# Allegro board DAVID_LUCA_2023_PACT_N8_rev6.brd
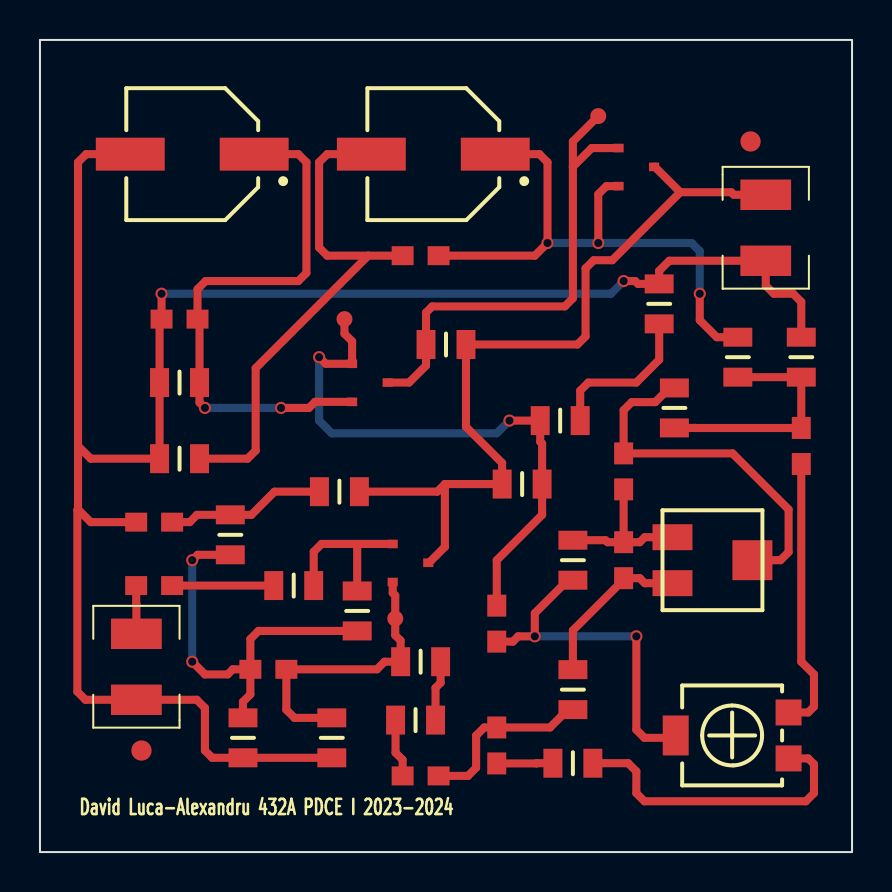
[diagram p0: board, top side]
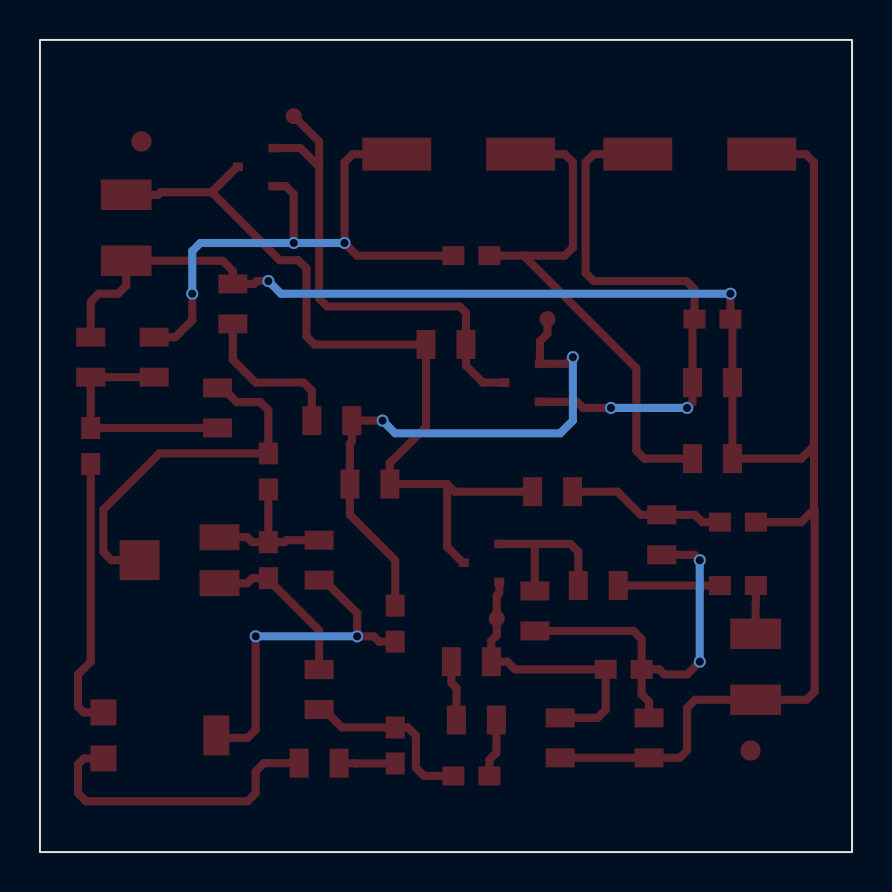
[diagram p1: board, bottom side, seen from below]

Outline 40.64 x 40.64 mm; copper layers: TOP, BOTTOM. Coordinates in mm from the lower left corner of the outline.
Outline path: rectangle 0,0 40.64,40.64

## Design rules (mm)
nets with their own width: min track width 0.406; nets 0 N56928 N56942 N57058 N57064 N57080 N57092 N57114 N57224 N57230 N57234 N57380 N57386 N57392 N57408 N57452 N57458 N57528 N57592 N57832 N57998 N58004 N576520 N576740 N578981

## Placement (name value [footprint] x y rotation side)
C1  100n  [CAPC2008X126N_0805]  5.71 13.34 0 top
C2  4.7u  [CAPC2008X126N_0805]  11.43 9.14 0 top
C3  4.7u  [CAPC2008X126N_0805]  19.05 3.81 0 top
C4  1u  [CAPC2008X126N_0805]  22.86 11.43 90 top
C5  10u  [CAPAE660X770N]  7.62 34.92 180 top
C6  10u  [CAPAE660X770N]  19.68 34.92 180 top
C7  4.7u  [CAPC2008X126N_0805]  5.71 16.51 0 top
C8  100n  [CAPC2008X126N_0805]  29.21 14.61 90 top
C9  100n  [CAPC2008X126N_0805]  29.21 19.05 90 top
C10  2.2n  [CAPC2008X126N_0805]  22.86 5.33 270 top
C11  2.2n  [CAPC2008X126N_0805]  38.1 20.32 90 top
C12  4.7u  [CAPC2008X126N_0805]  6.99 26.67 0 top
C13  4.7u  [CAPC2008X126N_0805]  19.05 29.84 180 top
IN  CON2  [1210RF_WV_12D]  4.83 9.27 270 top
J3  CON1  [TP80]  17.78 11.68 0 top
J4  CON1  [TP80]  15.24 26.67 0 top
J5  CON1  [TP80]  27.94 36.83 0 top
NOREF  Value  [unnamed]  35.56 35.56 0 top
NOREF#2  Value  [unnamed]  5.08 5.08 0 top
P1  50K  [TRIM_BI_23AN]  33.66 14.61 180 top
P2  100k  [TS53YL]  37.47 6.99 0 top
Q1  BC846B  [SOT23]  18.54 14.48 0 top
Q2  BC846B  [SOT23]  16.51 23.5 0 top
Q3  BC846B  [SOT23]  29.84 34.29 0 top
R1  1k  [RES2012X50N_0805]  12.7 13.34 0 top
R2  68k  [RES2012X50N_0805]  9.53 15.88 90 top
R3  100k  [RES2012X50N_0805]  10.16 5.71 90 top
R4  22k  [RES2012X50N_0805]  14.99 18.03 180 top
R5  100k  [RES2012X50N_0805]  15.88 12.06 270 top
R6  5.6K  [RES2012X50N_0805]  14.61 5.71 270 top
R7  330  [RES2012X50N_0805]  19.05 9.53 0 top
R8  1000k  [RES2012X50N_0805]  24.13 18.41 180 top
R9  100k  [RES2012X50N_0805]  26.04 21.59 180 top
R10  100k  [RES2012X50N_0805]  20.32 25.4 0 top
R11  22k  [RES2012X50N_0805]  6.99 23.5 0 top
R12  6.8k  [RES2012X50N_0805]  34.92 24.77 90 top
R13  2.7k  [RES2012X50N_0805]  38.1 24.77 270 top
R14  8.2k  [RES2012X50N_0805]  26.67 8.13 270 top
R15  8.2k  [RES2012X50N_0805]  31.75 22.23 90 top
R16  2.2k  [RES2012X50N_0805]  26.67 4.45 180 top
R17  15k  [RES2012X50N_0805]  26.67 14.61 90 top
R18  100k  [RES2012X50N_0805]  30.99 27.43 270 top
R19  33  [RES2012X50N_0805]  18.8 6.6 180 top
R20  2.5k  [RES2012X50N_0805]  6.99 19.68 0 top
VCC  CON2  [1210RF_WV_12D]  36.32 31.24 90 top

## Library data of the parts
C1-C4 C7-C13 = C
C5 C6 = CAP POL
IN VCC = CON2
J3-J5 = CON1
P1 P2 = POT
Q1-Q3 = BC846B
R1-R20 = R

## Footprints (pads in the part's own frame, mm; a bottom-side part is the same pattern mirrored in y, then rotated)
1210RF_WV_12D
  rect 1.524x2.54 smd: 1(-1.651,0) 2(1.651,0)
CAPAE660X770N
  rect 3.45x1.65 smd: 1(-3.1,0) 2(3.1,0)
CAPC2008X126N_0805
  rect 1.1x0.95 smd: 1(-0.9,0) 2(0.9,0)
RES2012X50N_0805
  rect 0.95x1.45 smd: 1(-1,0) 2(1,0)
SOT23
  rect 0.508x0.432 smd: 1(-0.889,0.94) 2(-0.889,-0.965) 3(0.889,0)
TP80
  round 0.8 smd: 1(0,0)
TRIM_BI_23AN
  rect 2x1.3 smd: 1(2,1.15) 2(2,-1.15)
  rect 2x2 smd: 3(-2,0)
TS53YL
  rect 1.3x1.3 smd: 1(0,0) 3(0,-2.3)
  rect 1.3x2 smd: 2(-5.65,-1.15)
unnamed
  round 1.016 smd: 1(0,0)

## Nets
0: C5.2 C7.1 C12.1 IN.2 R3.1 R6.2 R11.1 R13.1 R18.1 R20.1 VCC.1
N56928: C7.2 R2.2 R4.2
N56942: Q1.3 Q3.3 R4.1 R8.2 R10.2 VCC.2
N57058: C3.2 C10.1 R14.2
N57064: C8.1 P1.1 R14.1
N57080: C9.2 P1.3 R15.2
N57092: C11.2 R12.1 R13.2 R15.1
N57114: C8.2 C9.1 P1.2(T) R17.2
N57224: C4.2 J4.1 Q2.1 R8.1 R9.2
N57230: J5.1 Q2.3 Q3.1 R10.1
N57234: C2.1 R2.1 R3.2 R5.2
N57380: C1.1 IN.1
N57386: C1.2 R1.1
N57392: Q1.1 R1.2 R5.1
N57408: C6.1 C13.1 Q3.2(E) R12.2
N57452: C2.2 J3.1 Q1.2(E) R6.1 R7.1
N57458: C4.1 P2.2(T) R17.1
N57528: C6.2 C13.2 R20.2
N57592: C5.1 C12.2 Q2.2(E) R11.2
N57832: R9.1 R18.2
N57998: P2.3 R16.1
N58004: C11.1 P2.1
N576520: R7.2 R19.1
N576740: C3.1 R19.2
N578981: C10.2 R16.2

Pads without a net: NOREF 1; NOREF#2 1

## Via types
v1: diameter 0.61, hole 0.406, TOP to BOTTOM, 13 vias

## Routing (per net, layer and track width the routed paths; a pad name or vN(x,y) marks a point on that pad's centre or on a via; arc(x,y) is an arc through that point)
0: length 97
  TOP w0.406: 1.91,17.14 2.54,16.51 C7.1 ; 1.91,17.14 1.91,20.32 ; 1.91,17.14 1.87,17.11 1.87,8.03 2.28,7.62 IN.2 7.85,7.62 8.26,7.21 8.26,5.08 8.62,4.72 R3.1 R6.2 ; 1.91,20.32 2.54,19.68 R20.1 R11.1 5.99,26.4 6.09,26.5 C12.1 v1(6.09,27.94) ; 1.91,20.32 1.91,34.52 2.31,34.92 C5.2 ; v1(29.21,28.57) 29.79,28.57 29.93,28.43 R18.1 30.99,29.08 31.5,29.59 VCC.1 36.32,28.35 36.73,27.94 37.69,27.94 38.1,27.53 R13.1
  BOTTOM w0.406: v1(29.21,28.57) 28.57,27.94 v1(6.09,27.94)
N56928: length 8
  TOP w0.406: C7.2 7.5,16.51 7.86,16.87 R2.2 10.58,16.87 11.74,18.03 R4.2
N56942: length 41.4
  TOP w0.406: 20.26,18.41 19.88,18.03 R4.1 ; 20.26,18.41 20.26,15.27 19.47,14.48 Q1.3 ; 20.26,18.41 R8.2 23.13,19.47 21.32,21.28 R10.2 26.9,25.4 27.3,25.81 27.3,29.21 27.71,29.62 28.64,29.62 32.04,33.02 ; VCC.2 34.72,32.89 34.59,33.02 32.04,33.02 ; Q3.3 30.77,34.29 32.04,33.02
N57058: length 9
  TOP w0.406: R14.2 26.42,7.13 25.53,6.23 C10.1 22.23,6.23 21.83,5.83 21.83,4.22 21.42,3.81 C3.2
N57064: length 8.2
  TOP w0.406: R14.1 26.67,11.09 29.21,13.63 C8.1 30.02,13.71 30.27,13.45 P1.1
N57080: length 18.7
  TOP w0.406: R15.2 31.5,23.22 30.79,22.52 29.62,22.52 29.21,22.11 C9.2 34.66,19.95 37.47,17.14 37.47,15.01 37.06,14.61 P1.3
N57092: length 12.1
  TOP w0.406: R15.1 32.81,21.23 32.81,21.22 C11.2 R13.2 R12.1
N57114: length 7.8
  TOP w0.406: C9.1 C8.2 ; C8.2 28.4,15.5 28.3,15.6 R17.2 ; C8.2 30.02,15.5 30.27,15.76 P1.2
N57224: length 29.2
  TOP w0.406: C4.2 22.86,14.61 25.13,16.87 R8.1 25.13,20.44 25.04,20.53 R9.2 v1(23.5,21.59) ; v1(13.97,24.77) 14.3,24.43 15.62,24.43 15.62,25.56 15.24,25.94 J4.1
  BOTTOM w0.406: v1(23.5,21.59) 22.86,20.95 14.61,20.95 13.97,21.59 v1(13.97,24.77)
N57230: length 24.9
  TOP w0.406: J5.1 26.67,35.56 26.67,34.29 ; Q2.3 18.47,23.5 19.32,24.34 R10.1 19.32,26.99 19.63,27.3 26.26,27.3 26.67,27.71 26.67,34.29 ; 26.67,34.29 27.61,35.23 Q3.1
N57234: length 20
  TOP w0.406: C2.1 10.53,10.66 10.94,11.07 R5.2 ; C2.1 9.65,9.14 9.4,8.89 8.26,8.89 v1(7.62,9.53) ; C2.1 10.53,7.89 10.16,7.52 R3.2 ; v1(7.62,14.61) 7.89,14.88 R2.1
  BOTTOM w0.406: v1(7.62,14.61) v1(7.62,9.53)
N57380: length 2.4
  TOP w0.406: IN.1 4.83,12.4 4.82,12.41 C1.1
N57386: length 5.1
  TOP w0.406: C1.2 R1.1
N57392: length 8.2
  TOP w0.406: 15.88,15.42 14.09,15.42 13.7,15.03 R1.2 ; 15.88,15.42 17.65,15.42 ; 15.88,15.42 R5.1
N57408: length 29.7
  TOP w0.406: Q3.2 28.35,33.32 27.94,32.92 v1(27.94,30.48) ; C13.1 24.77,29.84 v1(25.4,30.48) 25.4,34.52 24.99,34.92 C6.1 ; v1(33.02,27.94) 33.02,26.61 33.87,25.76 R12.2
  BOTTOM w0.406: v1(25.4,30.48) v1(27.94,30.48) 32.61,30.48 33.02,30.07 v1(33.02,27.94)
N57452: length 14.5
  TOP w0.406: R6.1 12.74,6.71 12.33,7.12 C2.2 16.86,9.14 17.24,9.53 R7.1 18.05,10.58 17.78,10.85 J3.1 17.78,12.84 17.65,12.97 17.65,13.51
N57458: length 17.7
  TOP w0.406: R17.1 26.42,13.61 24.77,11.95 v1(24.77,10.79) 23.93,10.79 23.67,10.53 C4.1 ; P2.2 31.7,5.71 30.25,5.71 29.84,6.12 v1(29.84,10.79)
  BOTTOM w0.406: v1(24.77,10.79) v1(29.84,10.79)
N57528: length 26.5
  TOP w0.406: R20.2 10.39,19.68 10.79,20.09 10.79,24.22 16.42,29.84 ; 16.42,29.84 C13.2 ; 16.42,29.84 14.38,29.84 13.97,30.25 13.97,34.52 14.38,34.92 C6.2
N57592: length 27.7
  TOP w0.406: C5.1 12.93,34.92 13.34,34.52 13.34,28.98 12.93,28.57 8.29,28.57 7.88,28.17 C12.2 7.88,26.44 7.98,26.34 R11.2 7.98,22.5 v1(8.26,22.23) ; 15.62,22.53 13.77,22.53 13.46,22.23 v1(12.06,22.23)
  BOTTOM w0.406: v1(8.26,22.23) v1(12.06,22.23)
N57832: length 7.9
  TOP w0.406: R18.2 30.99,24.64 29.84,23.5 27.44,23.5 27.03,23.09 R9.1
N57998: length 15.5
  TOP w0.406: R16.1 29.44,4.45 29.84,4.04 29.84,2.95 30.25,2.54 38.33,2.54 38.73,2.95 38.73,4.4 38.45,4.69 P2.3
N58004: length 13.8
  TOP w0.406: C11.1 38.1,9.53 38.73,8.89 38.73,7.27 38.45,6.99 P2.1
N576520: length 3
  TOP w0.406: R7.2 20.05,8.47 19.8,8.22 R19.1
N576740: length 2.9
  TOP w0.406: C3.1 18.15,4.62 17.8,4.97 R19.2
N578981: length 2.8
  TOP w0.406: C10.2 24.85,4.43 24.86,4.45 R16.2

## Text on the board
User.Comments: *  SURFACE | L1 TOP CONDUCTOR | *  DIELECTRIC | L2 BOTTOM CONDUCTOR | DESIGN CROSS SECTION CHART | ___________________________ | TOTAL THICKNESS 64 MIL | 1-2
Ref Des/Silkscreen Top: David Luca-Alexandru 432A PDCE I 2023-2024
PLACE_BOUND_TOP: FIGURE | FINISHED_SIZE | 16.0 | DRILL CHART: TOP to BOTTOM | ALL UNITS ARE IN MILS | PLATED | QTY | 13
